# Altium PCB PCB_2020-07-10_02-44-51_2020-07-10_09-57-35.pcbdoc
Units mm, origin at the board's own origin, x right, y up, seen from the top; angles counter-clockwise.
Board outline 72.46 x 59.93 mm, 2 copper layers (Top Layer, Bottom Layer); 7 components, 14 nets, 31 pads, 2 vias.
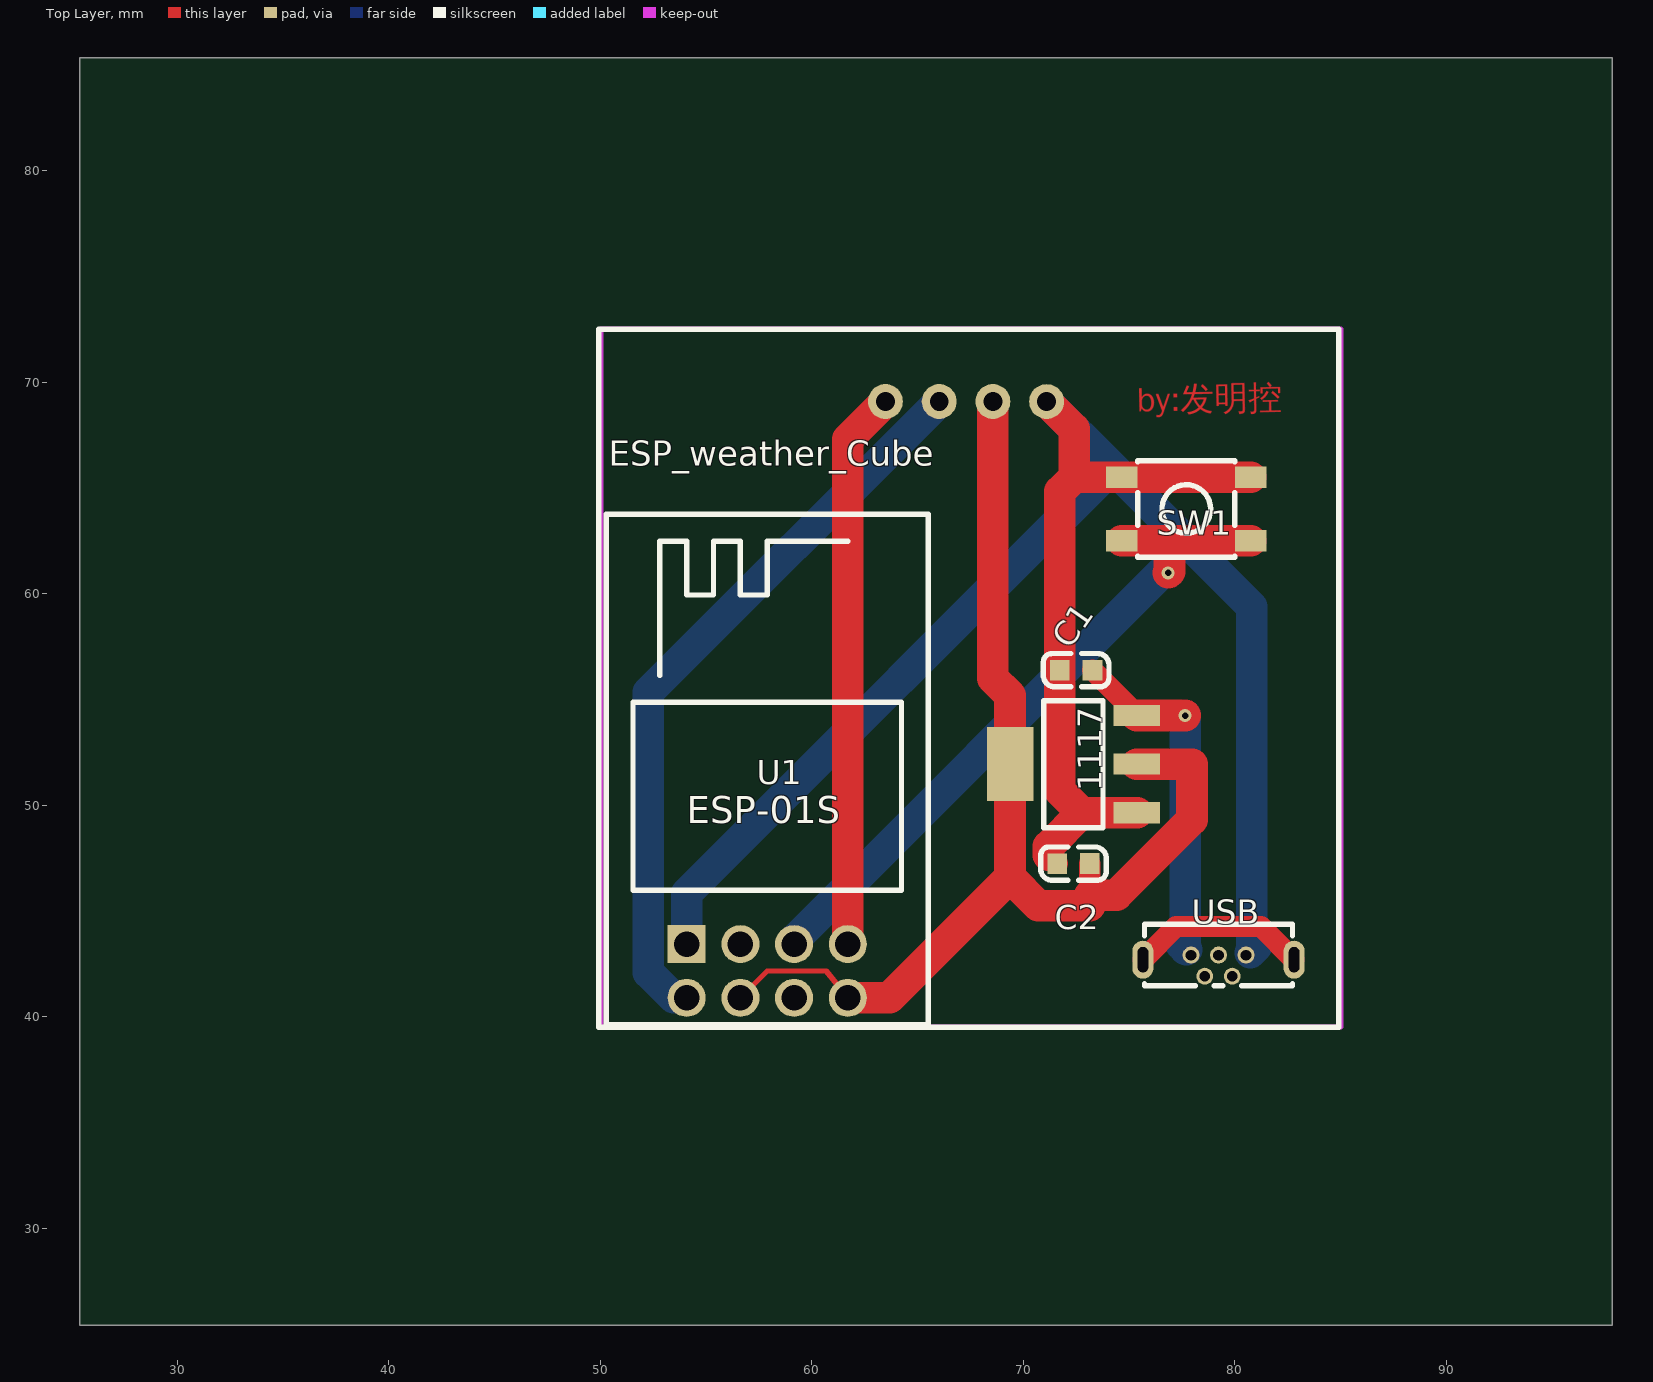
[diagram p0: Top Layer view]
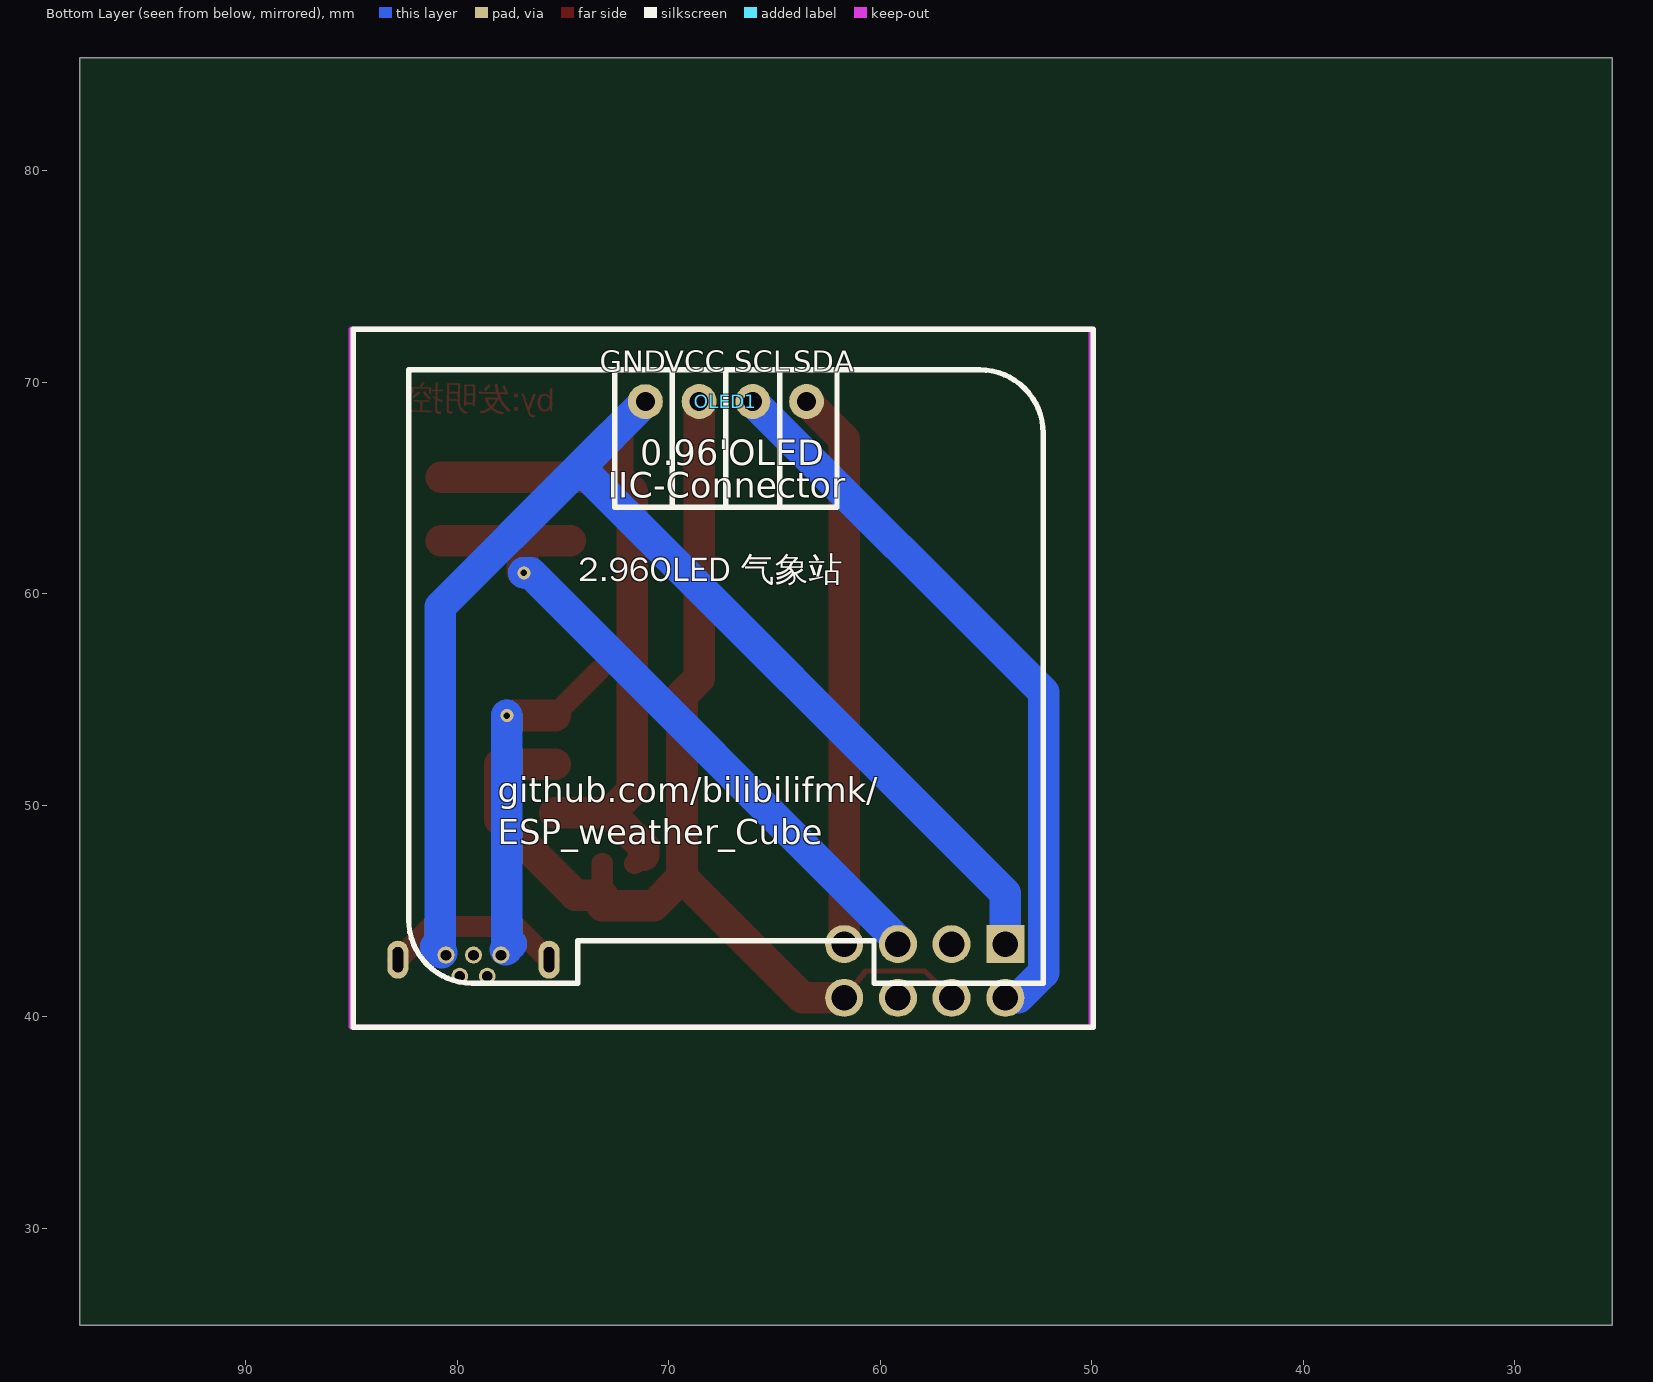
[diagram p1: Bottom Layer view, seen from below]

## Layer stack, top to bottom
Top Layer: signal copper (thickness not stored)
Dielectric: dielectric 0.32, FR-4, Dk 4.8
Bottom Layer: signal copper (thickness not stored)

## Board outline
97.86,25.4 25.4,25.4 25.4,85.332 97.86,85.332

## Components (designator, comment, footprint, x,y, rotation, side; value= is the part's Value field where it differs from the comment)
1117 "BL1117-3.3_JX" SOT223_JX 72.385,51.931 r0 top
C1 "10μF/10V" 0603_C_JX 72.512,56.376 r0 top
C2 "10μF/10V" 0603_C_JX 72.385,47.232 r0 top
OLED1 "0.96OLED_4P" 0.96OLED_4P 67.305,69.076 r0 bottom
SW1 "K2-1109SP-A3SA-04" KEY-SMD_4P-L4.5-W4.5-P3.00-LS6.5-TL 77.719,63.996 r0 top
U1 "ESP-01S" WIFIM-TH_ESP-01S 57.907,42.152 r0 top
USB "MICRO 180°JB" MINI-USB-SMD_U255-051N-4BH70-XS 79.243,42.406 r180 top

## Footprints (in the part's own frame and the unit in brackets; to place one, negate y for a bottom-side part, rotate by r counter-clockwise, add the part's x,y. Pads: shape width x height; smd on the part's side, far side on the other; paste and mask are expansions set on the pad)
0.96OLED_4P [mm]
  round 1.65 hole 0.89: 1(3.81,0.001) 2(1.27,-0.002) 3(-1.27,-0.002) 4(-3.81,-0.002)
  silkscreen extent -15,-1.5 15,27.5
0603_C_JX [mm]
  rect 0.93x0.98 smd: 1(-0.77,-0.005) 2(0.772,0)
  silkscreen extent -1.55,-0.79 1.55,0.79
KEY-SMD_4P-L4.5-W4.5-P3.00-LS6.5-TL [mm]
  rect 1.5x1 smd: 1(-3.05,1.5) 2(3.05,1.5) 3(-3.05,-1.5) 4(3.05,-1.5)
  silkscreen extent -2.29,-2.29 2.29,2.29
MINI-USB-SMD_U255-051N-4BH70-XS [mm]
  round 0.8 hole 0.5: 1(1.3,-0.5) 2(0.65,0.5) 3(0,-0.5) 4(-0.65,0.5) 5(-1.3,-0.5)
  oval 1x1.799 hole 0.5 slot 1.2 at 90 deg: 6(-3.575,-0.28) 6(3.575,-0.28)
  silkscreen extent -3.5,-1.95 3.5,0.95
SOT223_JX [mm]
  rect 2.2x1 smd: 1(3,-2.3) 2(3,0) 3(3,2.3)
  rect 2.2x3.5 smd: 2(-3,0)
  silkscreen extent -1.4,-3 1.4,3
WIFIM-TH_ESP-01S [mm]
  rect 1.8x1.8 hole 1.2: 1(-3.81,1.27)
  round 1.8 hole 1.2: 2(-1.27,1.27) 3(1.27,1.27) 4(3.81,1.27) 5(3.81,-1.27) 6(1.27,-1.27) 7(-1.27,-1.27) 8(-3.81,-1.27)
  silkscreen extent -7.62,-2.54 7.62,21.59

## Via types
v1: diameter 0.61, hole 0.31, Top Layer to Bottom Layer, 2 vias

## Nets (pads, with @x,y where several pads share a name; then routed paths per layer and width w, separated by ;. In a path a pad name is that pad's centre, name@x,y a point inside that pad or via, vN(x,y) a via of type N, cw(c..) or ccw(c..) an arc to the next point about the centre after c; other vN are vias at no path point)
3V3: 1117.2 C2.2 OLED1.2 U1.5 U1.7 | length 56.9
  Top Layer w0.254: U1.7 57.907,42.152 60.574,42.152 60.701,42.152 U1.5
  Top Layer w1: 73.157,45.733 C2.2
  Top Layer w1.5: U1.5 63.688,40.882 69.385,46.579 ; OLED1.2@68.575,69.076 68.575,55.992 69.385,55.182 69.385,51.931 69.385,46.579 ; 1117.2@75.385,51.931 77.986,51.931 77.986,49.305 74.414,45.733 73.157,45.733 73.157,45.241 70.724,45.241 69.385,46.579
5V: 1117.3 C1.2 USB.1 | length 16.7
  Top Layer w1: C1.2 75.385,54.274 1117.3
  Top Layer w1.5: 1117.3@75.385,54.23 v1(77.666,54.23)
  Bottom Layer w1.5: 77.454,43.433 USB.1@77.73,43.157 ; USB.1@77.666,43.183 v1(77.666,54.23)
GND: 1117.1 C1.1 C2.1 OLED1.1 SW1.1 SW1.2 U1.1 USB.5 | length 96
  Top Layer w1: C2.1@71.209,47.633 C2.1
  Top Layer w1.5: OLED1.1@71.115,69.073 72.418,67.773 72.418,65.495 ; C2.1@71.209,47.633 71.209,48.055 72.784,49.63 ; 1117.1@75.385,49.63 72.784,49.63 ; SW1.2@80.769,65.495 74.668,65.495 72.578,65.495 72.418,65.495 ; 72.418,65.495 71.742,64.819 C1.1 71.742,50.671 72.784,49.63
  Bottom Layer w1.5: U1.1 54.097,45.822 74.231,65.957 ; OLED1.1@71.115,69.073 74.231,65.957 ; USB.5@80.744,43.018 81.021,43.295 ; USB.5@80.82,43.183 80.82,59.368 74.231,65.957
S$35: 
S$43: 
U1_2: U1.2
U1_3: SW1.3 SW1.4 U1.3 | length 32.7
  Top Layer w1.5: SW1.3@74.668,62.495 76.921,62.495 ; v1(76.86,60.978) 76.921,61.039 76.921,62.495 ; SW1.4@80.769,62.495 76.921,62.495
  Bottom Layer w1.5: U1.3 59.177,43.607 76.548,60.978 v1(76.86,60.978)
U1_4: OLED1.4 U1.4 | length 26.4
  Top Layer w1.5: U1.4 61.717,67.298 OLED1.4@63.495,69.076
U1_6: U1.6
U1_8: OLED1.3 U1.8 | length 35
  Bottom Layer w1.5: U1.8 53.487,40.882 52.283,42.083 52.283,55.327 OLED1.3@66.035,69.076
USB1_2: USB.2
USB1_3: USB.3
USB1_4: USB.4
USB1_6: USB.6 | length 8.4
  Top Layer w1: USB.6@75.669,42.685 77.236,44.253 81.25,44.253 USB.6@82.819,42.685

## Other copper
Top Layer:
  text "by:发明控" at 75.433,68.187 h2 r1

## Silkscreen, mask and mechanical layers (free items; w line width, h text height)
Top Overlay:
  lines w0.254: 49.932,39.495 84.932,39.495 84.932,72.495 49.932,72.495 49.932,39.495
  text "ESP_weather_Cube" at 50.414,65.647 h2
Bottom Overlay:
  lines w0.254: 49.932,39.495 84.932,39.495 84.932,72.495 49.932,72.495 49.932,39.495
  text "SDA" at 64.13,70.481 h1
  text "SCL" at 66.924,70.481 h1
  text "VCC" at 70.226,70.481 h1
  text "GND" at 73.274,70.481 h1
  text "2.96OLED 气象站" at 74.29,60.186 h2
  text "github.com/bilibilifmk/ / ESP_weather_Cube" at 78.1,47.74 h2
Top Solder:
  text "by:发明控" at 75.433,68.187 h2 r1
Document:
  lines w0.003: 61.605,55.341 61.655,55.391

## Text inside footprints (layer, text, board x,y; h text height)
OLED1: Bottom Overlay "IIC-Connector" at 72.893,64.539 h1.2; Bottom Overlay "0.96'OLED" at 71.369,66.063 h1.2